# EAGLE board main (EAGLE 9.6.1)
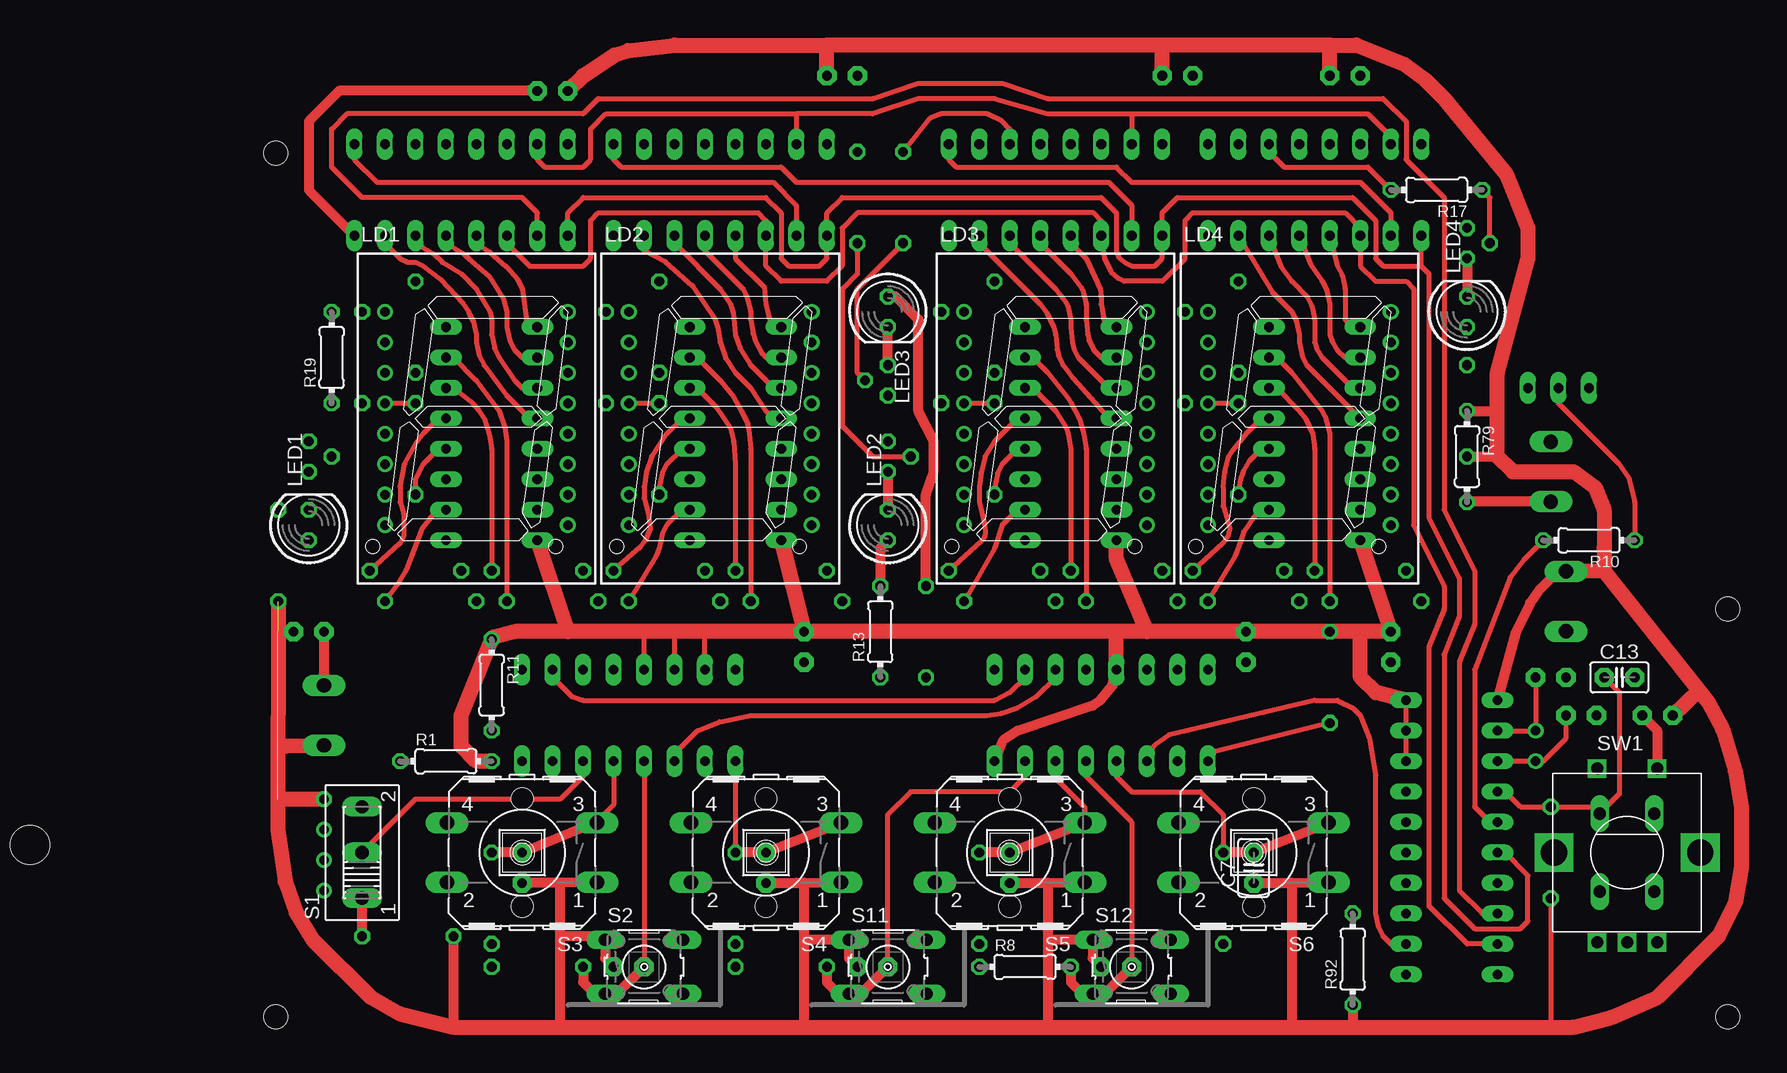
[diagram p0: board, top side]
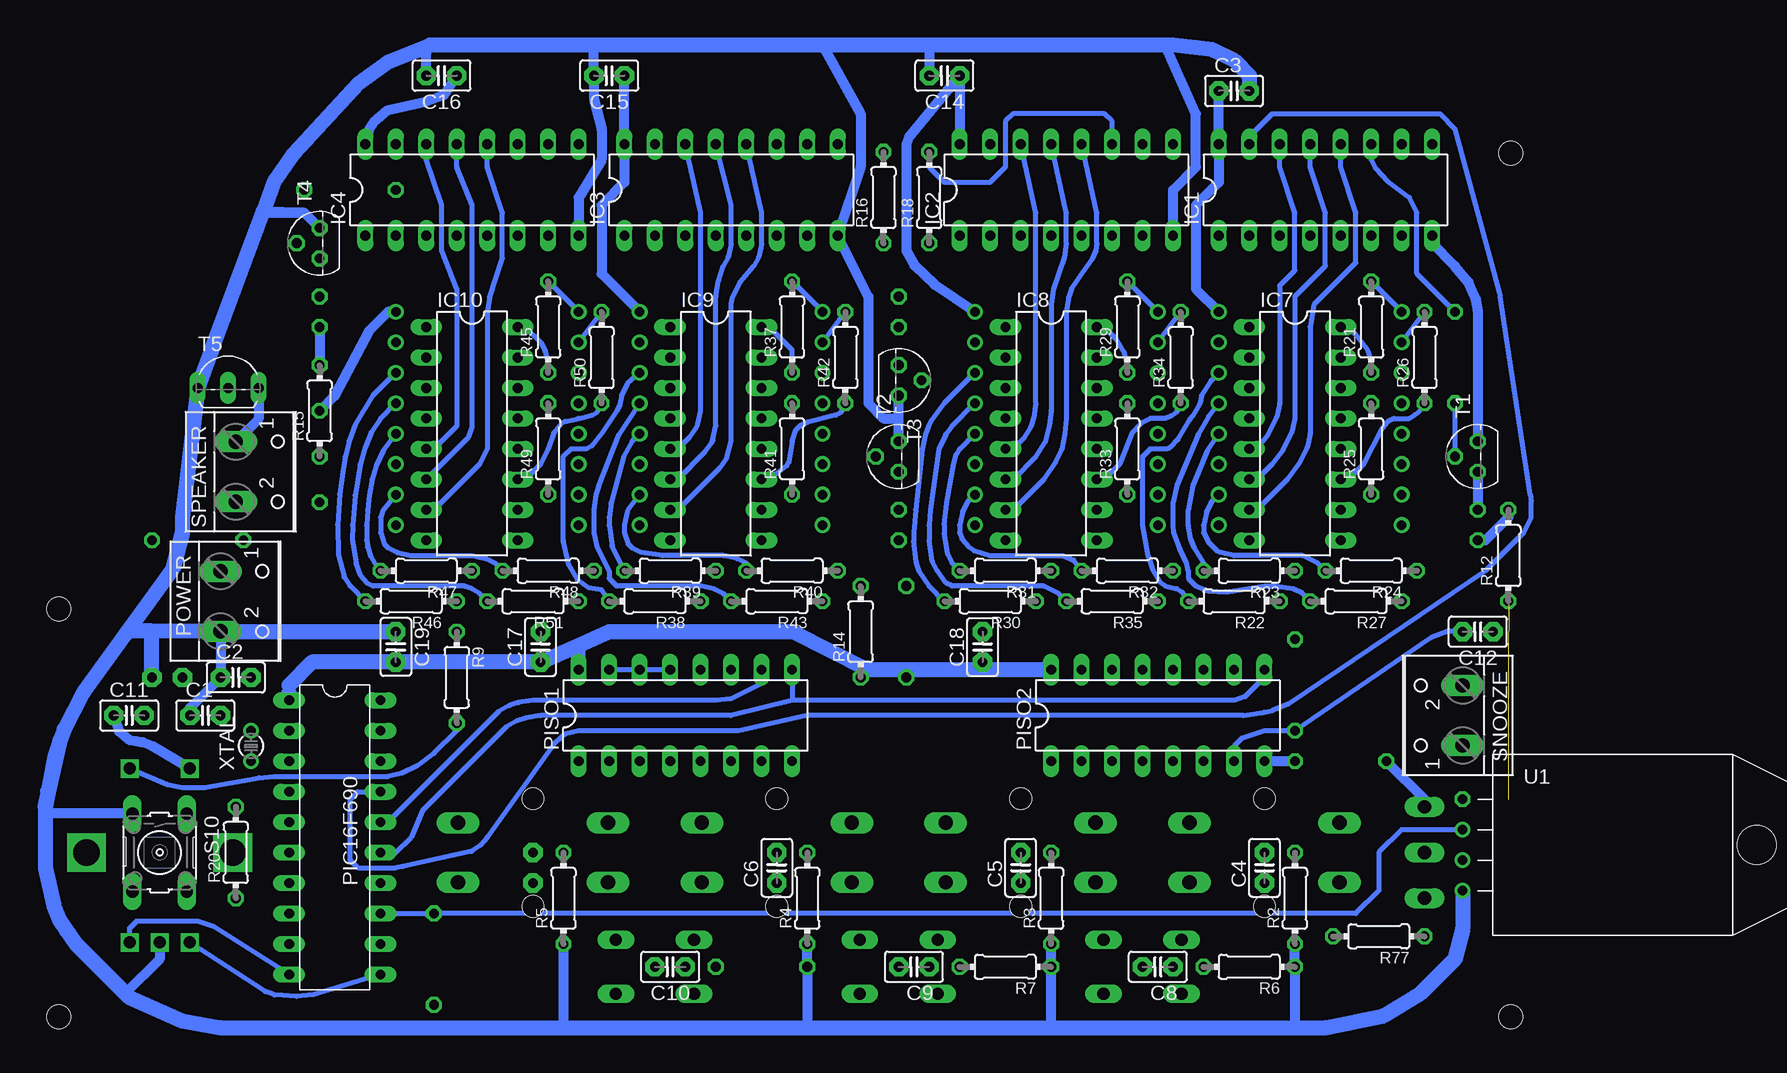
[diagram p1: board, bottom side, seen from below]

No outline drawn. Coordinates in mm, seen from the top.
Copper layers (1*16): Top 0.035mm / dielectric 0.15mm / Bottom 0.035mm
Design rules "default": minimum track width 6mil, minimum drill 0.35mm, track to track 6mil, track to pad 6mil, pad to pad 6mil, via to via 6mil, smd to smd 6mil, copper to edge 40mil, drill to drill 6mil, minimum pad ring 10mil, minimum via ring 8mil, stop-mask expansion 4mil, vias tented up to drill 0mil, thermal gap 10mil
Holes 2 mm at 29,6 29,78 150,40 150,6

## Footprints (pad centres in the part's own frame; a part is rotated, then mirrored left to right if it is on the bottom)
C2.5-2 = drill 0.813 pad 1.6 octagon: 1 -1.27,0; 2 1.27,0
DIL16 = drill 0.813 long: 1 -8.89,-3.81; 2 -6.35,-3.81; 3 -3.81,-3.81; 4 -1.27,-3.81; 5 1.27,-3.81; 6 3.81,-3.81; 7 6.35,-3.81; 8 8.89,-3.81; 9 8.89,3.81; 10 6.35,3.81; 11 3.81,3.81; 12 1.27,3.81; 13 -1.27,3.81; 14 -3.81,3.81; 15 -6.35,3.81; 16 -8.89,3.81
SA08 = drill 0.8 pad 1.27: 1 -7.62,8.89; 2 -7.62,6.35; 3 -7.62,3.81; 4 -7.62,1.27; 5 -7.62,-1.27; 6 -7.62,-3.81; 7 -7.62,-6.35; 8 -7.62,-8.89; 9 7.62,-8.89; 10 7.62,-6.35; 11 7.62,-3.81; 12 7.62,-1.27; 13 7.62,1.27; 14 7.62,3.81; 15 7.62,6.35; 16 7.62,8.89
LED5MM = drill 0.813 octagon: A -1.27,0; K 1.27,0
DIL20 = drill 0.813 long: 1 -11.43,-3.81; 2 -8.89,-3.81; 3 -6.35,-3.81; 4 -3.81,-3.81; 5 -1.27,-3.81; 6 1.27,-3.81; 7 3.81,-3.81; 8 6.35,-3.81; 9 8.89,-3.81; 10 11.43,-3.81; 11 11.43,3.81; 12 8.89,3.81; 13 6.35,3.81; 14 3.81,3.81; 15 1.27,3.81; 16 -1.27,3.81; 17 -3.81,3.81; 18 -6.35,3.81; 19 -8.89,3.81; 20 -11.43,3.81
W237-102 = drill 1.194 long: 1 -2.5,-1.27; 2 2.5,-1.27
0204/7 = drill 0.813 octagon: 1 -3.81,0; 2 3.81,0
255SB = drill 1.118 long: 1 -3.81,0; 2 0,0; 3 3.81,0
B3F-10XX = drill 1.016 long: 1 -3.251,2.261; 2 3.251,2.261; 3 -3.251,-2.261; 4 3.251,-2.261
B3F-40XX = drill 1.194 long: 1 -6.248,2.489; 2 6.248,2.489; 3 -6.248,-2.489; 4 6.248,-2.489 | hole 1.803: 0,-4.496; 0,4.496
ALPS_EC12E_SW = drill 1 square: A -2.5,-7.5; B 2.5,-7.5; C 0,-7.5; D -2.5,7; E 2.5,7 | drill 2.2 square: GND1 -6.1,0; GND2 6.1,0
TO92 = drill 0.813 octagon: 1 1.27,0; 2 0,1.905; 3 -1.27,0
TO92-EBC = drill 0.813 long: B 0,-1.27; C 2.54,-1.27; E -2.54,-1.27
RHT03_DHT-22/RA = drill 0.8: DATA -1.27,0; GND 3.81,0; NULL 1.27,0 | drill 0.8 octagon: VDD -3.81,0 | hole 3.25: 0,24.5
TC26V = drill 0.813: 1 -1.27,0; 2 1.27,0

## Placement (x,y rotation side)
C1  10pF  [C2.5-2]  137.79,31.11 0 bottom
C2  10pF  [C2.5-2]  135.25,34.29 0 bottom
C3  100nF  [C2.5-2]  52.07,83.19 0 bottom
C4  68nF  [C2.5-2]  49.53,18.41 90 bottom
C5  68nF  [C2.5-2]  69.85,18.41 90 bottom
C6  68nF  [C2.5-2]  90.17,18.41 90 bottom
C7  68nF  [C2.5-2]  110.49,18.41 90 top
C8  68nF  [C2.5-2]  58.42,10.16 180 bottom
C9  68nF  [C2.5-2]  78.74,10.16 180 bottom
C10  68nF  [C2.5-2]  99.06,10.16 180 bottom
C11  68nF  [C2.5-2]  144.15,31.11 0 bottom
C12  68nF  [C2.5-2]  31.75,38.1 180 bottom
C13  68nF  [C2.5-2]  140.97,34.29 0 top
C14  100nF  [C2.5-2]  76.2,84.45 180 bottom
C15  100nF  [C2.5-2]  104.14,84.45 180 bottom
C16  100nF  [C2.5-2]  118.11,84.45 180 bottom
C17  100nF  [C2.5-2]  109.86,36.83 90 bottom
C18  100nF  [C2.5-2]  73.03,36.83 90 bottom
C19  100nF  [C2.5-2]  121.92,36.83 270 bottom
IC1  4094N  [DIL16]  44.45,74.93 0 bottom
IC2  4094N  [DIL16]  66.04,74.93 0 bottom
IC3  4094N  [DIL16]  93.98,74.93 0 bottom
IC4  4094N  [DIL16]  115.57,74.93 0 bottom
IC7  ULN2003AN  [DIL16]  46.99,54.61 270 bottom
IC8  ULN2003AN  [DIL16]  67.31,54.61 270 bottom
IC9  ULN2003AN  [DIL16]  95.25,54.61 270 bottom
IC10  ULN2003AN  [DIL16]  115.57,54.61 270 bottom
LD1  SA08-11  [SA08]  45.72,55.88 0 top
LD2  SA08-11  [SA08]  66.04,55.88 0 top
LD3  SA08-11  [SA08]  93.98,55.88 0 top
LD4  SA08-11  [SA08]  114.3,55.88 0 top
LED1  [LED5MM]  31.75,46.99 90 top
LED2  [LED5MM]  80.01,46.99 90 top
LED3  [LED5MM]  80.01,64.77 270 top
LED4  [LED5MM]  128.27,64.77 90 top
PIC16F690  [DIL20]  127,20.95 270 bottom
PISO1  4021N  [DIL16]  97.79,31.11 0 bottom
PISO2  4021N  [DIL16]  58.42,31.11 0 bottom
POWER  [W237-102]  135.25,40.64 270 bottom
R1  560  [0204/7]  43.18,27.3 0 top
R2  560  [0204/7]  46.99,15.88 90 bottom
R3  560  [0204/7]  67.31,15.88 90 bottom
R4  560  [0204/7]  87.63,15.88 90 bottom
R5  560  [0204/7]  107.95,15.88 90 bottom
R6  560  [0204/7]  50.8,10.16 180 bottom
R7  560  [0204/7]  71.12,10.16 180 bottom
R8  560  [0204/7]  91.44,10.16 0 top
R9  560  [0204/7]  116.84,34.29 270 bottom
R10  1K  [0204/7]  138.43,45.72 180 top
R11  560  [0204/7]  46.99,33.66 270 top
R12  200  [0204/7]  29.21,44.45 90 bottom
R13  200  [0204/7]  79.38,38.1 90 top
R14  200  [0204/7]  83.19,38.1 90 bottom
R15  200  [0204/7]  128.27,56.52 90 bottom
R16  1K  [0204/7]  81.28,74.3 90 bottom
R17  1K  [0204/7]  125.73,74.93 180 top
R18  1K  [0204/7]  77.47,74.3 90 bottom
R19  1K  [0204/7]  33.66,60.96 90 top
R20  560  [0204/7]  135.25,19.68 90 bottom
R21  200  [0204/7]  40.64,63.5 90 bottom
R22  200  [0204/7]  52.07,40.64 180 bottom
R23  200  [0204/7]  50.8,43.18 180 bottom
R24  200  [0204/7]  40.64,43.18 180 bottom
R25  200  [0204/7]  40.64,53.34 90 bottom
R26  200  [0204/7]  36.2,60.96 90 bottom
R27  200  [0204/7]  41.91,40.64 180 bottom
R29  200  [0204/7]  60.96,63.5 90 bottom
R30  200  [0204/7]  72.39,40.64 180 bottom
R31  200  [0204/7]  71.12,43.18 180 bottom
R32  200  [0204/7]  60.96,43.18 180 bottom
R33  200  [0204/7]  60.96,53.34 90 bottom
R34  200  [0204/7]  56.52,60.96 90 bottom
R35  200  [0204/7]  62.23,40.64 180 bottom
R37  200  [0204/7]  88.9,63.5 90 bottom
R38  200  [0204/7]  100.33,40.64 180 bottom
R39  200  [0204/7]  99.06,43.18 180 bottom
R40  200  [0204/7]  88.9,43.18 180 bottom
R41  200  [0204/7]  88.9,53.34 90 bottom
R42  200  [0204/7]  84.45,60.96 90 bottom
R43  200  [0204/7]  90.17,40.64 180 bottom
R45  200  [0204/7]  109.22,63.5 90 bottom
R46  200  [0204/7]  120.65,40.64 180 bottom
R47  200  [0204/7]  119.38,43.18 180 bottom
R48  200  [0204/7]  109.22,43.18 180 bottom
R49  200  [0204/7]  109.22,53.34 90 bottom
R50  200  [0204/7]  104.78,60.96 90 bottom
R51  200  [0204/7]  110.49,40.64 180 bottom
R77  560  [0204/7]  40.01,12.7 180 bottom
R79  100  [0204/7]  128.27,52.7 270 top
R92  5K  [0204/7]  118.75,10.79 90 top
S1  [255SB]  36.2,19.68 90 top
S2  [B3F-10XX]  59.69,10.16 0 top
S3  [B3F-40XX]  49.53,19.68 180 top
S4  [B3F-40XX]  69.85,19.68 180 top
S5  [B3F-40XX]  90.17,19.68 180 top
S6  [B3F-40XX]  110.49,19.68 180 top
S10  [B3F-10XX]  141.6,19.68 270 bottom
S11  [B3F-10XX]  80.01,10.16 0 top
S12  [B3F-10XX]  100.33,10.16 0 top
SNOOZE  [W237-102]  34.29,31.11 90 bottom
SPEAKER  [W237-102]  133.99,51.44 270 bottom
SW1  EC12E_SW  [ALPS_EC12E_SW]  141.6,19.68 0 top
T1  BC547  [TO92]  31.75,52.7 90 bottom
T2  BC547  [TO92]  80.01,52.7 90 bottom
T3  BC547  [TO92]  80.01,59.05 270 bottom
T4  BC547  [TO92]  128.27,70.48 90 bottom
T5  [TO92-EBC]  135.89,59.69 0 bottom
U1  [RHT03_DHT-22/RA]  33.02,20.32 270 bottom
XTAL  [TC26V]  133.99,28.57 90 bottom

## Library data of the parts
C1-C19 = capacitor-wima
IC1-IC4 PISO1 PISO2 = 40xx
IC7-IC10 = uln-udn
LD1-LD4 LED1-LED4 = led
PIC16F690 = pic16f690
POWER SNOOZE SPEAKER = con-wago-500; MPN: 237-102; OC_FARNELL: unknown; OC_NEWARK: 70K9898
R1-R27 R29-R35 R37-R43 R45-R51 R77 R79 R92 = rcl; SPICEPREFIX: R
S1 = switch
S2 S10-S12 = switch-omron; MPN: B3F-1000; OC_FARNELL: 176432; OC_NEWARK: 36M3542
S3-S6 = switch-omron; MF: OMRON COMPONENTS USA; MPN: B3F-4000; OC_FARNELL: 176434; OC_NEWARK: 36K3105
SW1 = switch-alps; MPN: EC12E2424407; OC_FARNELL: 1520813; OC_NEWARK: 74M1068
T1-T4 = transistor
T5 = transistor-neu-to92
U1 = RHT03_DHT-22_AM2302; PROD_ID: SEN-10167
XTAL = crystal; OC_FARNELL: unknown; OC_NEWARK: unknown

## Nets
BTN_ALARM_SET: C4.2 PISO2.5 R2.2 S3.3
BTN_ALARM_TIMER_ON: PISO2.6 S1.2
BTN_BRIGHT_SET: C10.2 PISO1.5 R8.2 S12.3
BTN_ENCODER: C11.2 PISO1.1 R9.2 SW1.E
BTN_RESET: C13.1 PIC16F690.4 R20.2 S10.1
BTN_SEC_SET: C6.2 PISO1.6 R4.2 S5.3
BTN_SENSOR: C7.2 PISO1.4 R5.2 S6.3
BTN_SNOOZE: C12.2 PISO2.7 R11.2 SNOOZE.2
BTN_TIME_SET: C5.2 PISO2.1 R3.2 S4.3
BTN_TUNE_SET: C9.2 PISO1.7 R7.2 S11.3
BTN_VOLUME_SET: C8.2 PISO2.4 R6.2 S2.3
DHT11: PIC16F690.13 R92.2 U1.DATA
ENC_A: PIC16F690.11 SW1.A
ENC_B: PIC16F690.10 SW1.B
N$1: C1.2 PIC16F690.3 XTAL.1
N$2: C2.2 PIC16F690.2 XTAL.2
N$3: IC7.16 R21.1
N$5: IC7.15 R22.1
N$6: IC7.14 R23.1
N$7: R10.1 T5.B
N$8: R18.1 T2.2
N$9: IC3.4 IC9.1
N$13: IC3.5 IC9.2
N$14: IC3.6 IC9.3
N$15: IC3.7 IC9.4
N$16: IC3.14 IC9.5
N$17: IC3.13 IC9.6
N$18: IC3.12 IC9.7
N$19: IC1.11 R19.2
N$21: IC2.4 IC8.1
N$22: IC2.5 IC8.2
N$23: IC7.13 R24.1
N$24: IC7.12 R25.1
N$25: IC7.11 R26.1
N$26: IC2.6 IC8.3
N$27: IC2.7 IC8.4
N$28: IC2.14 IC8.5
N$29: IC2.13 IC8.6
N$30: IC2.12 IC8.7
N$31: IC2.11 R18.2
N$32: IC1.4 IC7.1
N$33: IC1.5 IC7.2
N$34: IC1.6 IC7.3
N$35: IC1.7 IC7.4
N$36: IC1.14 IC7.5
N$37: IC1.13 IC7.6
N$38: IC1.12 IC7.7
N$39: IC3.11 R16.2
N$40: IC4.4 IC10.1
N$41: IC4.5 IC10.2
N$42: IC4.6 IC10.3
N$43: IC4.7 IC10.4
N$44: IC4.14 IC10.5
N$45: IC4.13 IC10.6
N$46: IC4.12 IC10.7
N$47: IC4.11 R17.2
N$48: LD1.1 R21.2
N$49: LD1.14 R22.2
N$50: LD1.12 R23.2
N$51: LD1.10 R24.2
N$52: LD1.4 R25.2
N$53: LD1.2 R26.2
N$54: LD1.13 R27.2
N$56: LD2.1 R29.2
N$57: LD2.14 R30.2
N$58: LD2.12 R31.2
N$59: LD2.10 R32.2
N$60: LD2.4 R33.2
N$61: LD2.2 R34.2
N$62: LD2.13 R35.2
N$64: LD3.1 R37.2
N$65: LD3.14 R38.2
N$66: LD3.12 R39.2
N$67: LD3.10 R40.2
N$68: LD3.4 R41.2
N$69: LD3.2 R42.2
N$70: LD3.13 R43.2
N$72: LD4.1 R45.2
N$73: LD4.14 R46.2
N$74: LD4.12 R47.2
N$75: LD4.10 R48.2
N$76: LD4.4 R49.2
N$77: LD4.2 R50.2
N$78: LD4.13 R51.2
N$80: LED1.K T1.3
N$81: LED2.K T2.3
N$82: LED3.K T3.3
N$83: LED4.K T4.3
N$84: R19.1 T1.2
N$86: R16.1 T3.2
N$87: R17.1 T4.2
N$88: LED4.A R15.2
N$89: LED3.A R14.2
N$90: LED2.A R13.2
N$91: LED1.A R12.2
N$92: IC7.10 R27.1
N$93: IC1.9 IC2.2
N$94: IC2.9 IC3.2
N$95: IC3.9 IC4.2
N$97: IC8.16 R29.1
N$98: IC8.15 R30.1
N$99: IC8.14 R31.1
N$100: IC8.13 R32.1
N$101: IC8.12 R33.1
N$102: IC8.11 R34.1
N$103: IC8.10 R35.1
N$105: IC9.16 R37.1
N$106: IC9.15 R38.1
N$107: IC9.14 R39.1
N$108: IC9.13 R40.1
N$109: IC9.12 R41.1
N$110: IC9.11 R42.1
N$111: IC9.10 R43.1
N$113: IC10.16 R45.1
N$114: IC10.15 R46.1
N$115: IC10.14 R47.1
N$116: IC10.13 R48.1
N$117: IC10.12 R49.1
N$118: IC10.11 R50.1
N$119: IC10.10 R51.1
N$143: R77.1 S1.1
N$145: R1.1 S1.3
N$146: R79.2 SPEAKER.2
N$147: SPEAKER.1 T5.C
PISO-CONNECT: PISO1.11 PISO2.3
PISO_CLK: PIC16F690.16 PISO1.10 PISO2.10
PISO_DAT: PIC16F690.12 PISO1.3
PISO_LAT: PIC16F690.15 PISO1.9 PISO2.9
PWM: PIC16F690.5 R10.2
SIPO_CLK: IC1.3 IC2.3 IC3.3 IC4.3 PIC16F690.9
SIPO_DAT: IC1.2 PIC16F690.8
SIPO_LAT: IC1.1 IC2.1 IC3.1 IC4.1 PIC16F690.6
SIPO_OE: IC1.15 IC2.15 IC3.15 IC4.15 PIC16F690.17
VDD: C3.1 C4.1 C5.1 C6.1 C7.1 C8.1 C9.1 C10.1 C11.1 C12.1 C14.1 C15.1 C16.1 C17.1 C18.1 C19.2 IC1.16 IC2.16 IC3.16 IC4.16 LD1.16 LD2.16 LD3.16 LD4.16 PIC16F690.1 PISO1.16 PISO2.16 POWER.1 R12.1 R13.1 R14.1 R15.1 R20.1 R77.2 R79.1 R92.1 S2.1 S3.1 S4.1 S5.1 S6.1 S11.1 S12.1 SNOOZE.1 SW1.D U1.VDD
VSS: C1.1 C2.1 C3.2 C13.2 C14.2 C15.2 C16.2 C17.2 C18.2 C19.1 IC1.8 IC2.8 IC3.8 IC4.8 IC7.8 IC8.8 IC9.8 IC10.8 PIC16F690.18 PIC16F690.19 PIC16F690.20 PISO1.8 PISO1.13 PISO1.14 PISO1.15 PISO2.8 PISO2.13 PISO2.14 PISO2.15 POWER.2 R1.2 R2.1 R3.1 R4.1 R5.1 R6.1 R7.1 R8.1 R9.1 R11.1 S10.3 SW1.C T1.1 T2.1 T3.1 T4.1 T5.E U1.GND

## Tracks (layer width: path | path; a pad name or v marks a point on that pad's centre or on a via)
BTN_ALARM_SET
  Top 0.406: PISO2.5 57.15,23.65 55.73,22.23
  Top 0.813: S3.3 55.73,22.23 C4.2 R2.2
BTN_ALARM_TIMER_ON
  Top 0.406: PISO2.6 54.61,26.04 52.7,24.13 40.64,24.13 S1.2
BTN_BRIGHT_SET
  Top 0.406: C10.2 100.33,22.23 96.52,26.04 PISO1.5
  Top 0.813: C10.2 98.07,7.9 S12.3 96.24,7.9 95.25,8.89 R8.2
BTN_ENCODER
  Top 0.406: PISO1.1 106.68,27.94 R9.2
  Top 0.813: C11.2 144.1,29.89 SW1.E
  Bottom 0.406: R9.2 116.84,29.84 118.75,27.94 120.14,26.92 121.41,26.29 122.56,26.04 132.08,26.04 133.33,25.93 137.84,25.11 139.7,25.11 140.98,25.38 SW1.E
BTN_RESET
  Top 0.406: PIC16F690.4 131.44,24.77 132.72,23.5 R20.2 138.79,23.5 S10.1 140.97,24.56 140.97,33.02 C13.1
BTN_SEC_SET
  Top 0.406: PISO1.6 93.98,25.88 96.42,23.44 S5.3
  Top 0.813: R4.2 C6.2 S5.3
BTN_SENSOR
  Top 0.406: PISO1.4 99.06,26.04 100.33,24.77 106.05,24.77 107.95,22.86 R5.2
  Top 0.813: R5.2 C7.2 S6.3
BTN_SNOOZE
  Top 0.813: SNOOZE.2 C12.2
  Bottom 0.406: PISO2.7 52.07,28.57 51.44,29.21 49.53,29.84 R11.2 35.65,37.6 34.29,38.1 C12.2
BTN_TIME_SET
  Top 0.406: PISO2.1 R3.2
  Top 0.813: R3.2 C5.2 S4.3
BTN_TUNE_SET
  Top 0.406: C9.2 80.01,22.86 81.92,24.77 90.17,24.77 91.44,26.04 PISO1.7
  Top 0.813: C9.2 77.75,7.9 S11.3 76.48,7.62 76.2,7.62 74.93,8.89 R7.2
BTN_VOLUME_SET
  Top 0.406: PISO2.4 C8.2
  Top 0.813: C8.2 57.43,7.9 S2.3 56.16,7.62 55.88,7.62 54.61,8.89 R6.2
DHT11
  Bottom 0.406: 123.83,14.61 PIC16F690.13 R92.2 41.91,14.61 40.01,16.51 40.01,19.68 38.1,21.59 U1.DATA
ENC_A
  Bottom 0.406: PIC16F690.11 128.78,7.85 130.18,7.69 132.01,7.82 132.82,8.1 SW1.A
ENC_B
  Bottom 0.406: SW1.B 144.1,13.38 143.51,13.97 138.43,13.97 137.06,13.5 PIC16F690.10
N$1
  Top 0.406: PIC16F690.3 XTAL.1 134.62,27.3 136.53,29.21 C1.2
N$2
  Top 0.406: PIC16F690.2 XTAL.2 C2.2
N$3
  Bottom 0.406: R21.1 40.64,60.33 40.89,61.47 41.02,61.72 41.91,62.87 42.55,63.5 IC7.16
N$5
  Top 0.406: R22.1 48.26,53.98 48.07,55.18 47.62,56.52 45.72,59.05 43.81,60.96 | IC7.15 43.81,60.96 | 43.81,60.96 43.59,60.66
N$6
  Top 0.406: R23.1 46.99,53.34 46.8,54.55 46.35,55.88 45.87,56.61 45.22,57.33 43.81,58.42 IC7.14
N$7
  Top 0.406: R10.1 142.24,48.9 141.75,50.9 140.97,52.07 135.89,57.15 T5.B
N$8
  Top 0.406: R18.1 77.47,67.94 76.2,66.67 76.2,55.24 78.74,52.7 T2.2
N$9
  Top 0.406: IC3.4 95.25,70.48 96.52,69.22 97.72,66.67 97.79,66.04 97.79,65.41 97.98,64.2 98.11,63.82 98.42,63.5 IC9.1
N$13
  Top 0.406: IC3.5 92.71,70.48 95.25,67.94 96.14,66.8 96.27,66.55 96.52,65.41 96.52,64.14 96.65,62.9 96.77,62.36 97.16,61.59 97.79,60.96 IC9.2
N$14
  Top 0.406: IC3.6 90.17,70.48 93.98,66.67 94.87,65.53 95,65.28 95.25,64.14 95.25,63.5 95.38,62.26 95.5,61.72 95.89,60.96 98.42,58.42 IC9.3
N$15
  Top 0.406: IC3.7 87.63,70.48 92.71,65.41 93.26,64.7 93.85,63.47 93.98,62.87 94.11,61.62 94.23,61.09 94.61,60.33 95.45,59.21 97.23,57.22 98.42,55.88 IC9.4
N$16
  Bottom 0.406: IC9.5 98.42,53.34 97.47,54.29 96.9,55.12 96.77,55.37 96.52,56.52 96.52,73.03 IC3.14
N$17
  Bottom 0.406: IC9.6 98.42,50.8 96.2,53.02 95.63,53.85 95.5,54.1 95.25,55.24 95.25,66.04 95.06,67.25 94.61,68.58 94.23,69.34 93.98,70.48 93.98,73.66 IC3.13
N$18
  Bottom 0.406: IC9.7 98.42,48.26 94.93,51.75 94.36,52.58 93.98,53.98 93.98,65.41 93.86,66.02 93.22,67.25 92.08,68.58 91.69,69.34 91.44,70.48 91.44,73.03 IC3.12
N$19
  Bottom 0.406: IC1.11 40.64,77.47 40.26,76.71 39.29,75.67 37.47,74.3 36.83,73.03 36.83,67.94 R19.2
N$21
  Top 0.406: IC2.4 67.31,69.22 69.69,66.83 69.85,65.41 70.1,64.26 70.48,63.5 IC8.1
N$22
  Top 0.406: IC8.2 69.85,60.96 69.53,61.28 68.96,62.36 68.77,62.93 68.58,64.14 68.58,64.77 68.2,66.17 67.94,66.67 64.77,69.85 IC2.5
N$23
  Top 0.406: IC7.13 42.55,55.88 41.27,54.61 40.75,53.91 39.76,52.12 39.37,50.16 39.37,48.9 39.65,47.93 39.65,46.04 39.33,45.44 R24.1
N$24
  Top 0.406: IC7.12 42.55,53.34 41.27,52.07 40.64,50.8 R25.1
N$25
  Bottom 0.406: IC7.11 42.55,50.8 41.27,52.07 39.71,55.09 39.24,55.63 38.73,55.88 37.47,55.88 37.03,56.17 36.67,56.41 R26.1
N$26
  Top 0.406: IC8.3 70.48,58.42 68.58,60.33 67.69,61.72 67.31,62.87 67.12,64.71 66.86,65.47 66.04,66.67 62.23,70.48 IC2.6
N$27
  Top 0.406: IC2.7 59.69,69.85 61.47,68.96 63.76,66.92 65.6,64.2 65.85,63.44 66.04,62.23 66.48,60.9 67.31,59.69 68.58,58.42 69.85,56.52 70.48,55.88 IC8.4
N$28
  Bottom 0.406: IC8.5 70.48,53.34 69.53,54.29 69.03,55.18 68.77,55.94 68.58,57.15 68.58,73.03 IC2.14
N$29
  Bottom 0.406: IC8.6 70.48,50.8 68.58,52.7 67.8,53.94 67.46,55.28 67.31,56.52 67.31,65.41 67.12,66.61 66.23,69.28 66.04,70.48 66.04,73.03 IC2.13
N$30
  Bottom 0.406: IC8.7 70.48,48.26 67.94,50.8 66.95,52.2 66.43,53.29 66.16,54.63 66.04,55.88 66.04,64.77 65.85,65.98 65.6,66.74 64.77,67.94 63.91,69.12 63.6,69.86 63.5,70.48 63.5,73.03 IC2.12
N$31
  Bottom 0.406: IC2.11 62.23,80.64 62.87,81.28 70.48,81.28 71.12,80.64 71.12,76.83 72.39,75.56 76.2,75.56 77.47,76.83 R18.2
N$32
  Top 0.406: IC7.1 50.16,63.5 49.91,64.01 49.53,66.67 49.15,67.44 48.23,68.55 46.89,69.7 45.72,70.48 IC1.4
N$33
  Top 0.406: IC7.2 49.53,60.96 48.9,61.59 48.51,62.36 48.26,63.5 48.26,64.77 47.97,65.86 46.8,67.73 45.09,69.22 44.77,69.53 43.18,70.48 IC1.5
N$34
  Top 0.406: IC7.3 49.53,58.42 48.9,59.05 47.62,60.96 47.24,61.72 46.99,62.87 46.99,64.14 46.86,64.74 45.72,66.67 44.45,67.94 42.86,68.9 42.23,69.53 40.64,70.48 IC1.6
N$35
  Top 0.406: IC7.4 50.16,55.88 48.26,57.78 46.35,60.33 45.97,61.09 45.72,62.23 45.72,62.87 45.47,64.01 45.09,64.77 44.6,65.5 42.7,67.51 41.27,68.58 40.64,68.9 40.01,68.9 39.37,69.22 38.1,70.48 IC1.7
N$36
  Bottom 0.406: IC7.5 50.16,53.34 49.28,54.48 48.51,56.01 48.26,57.15 48.26,66.94 46.99,68.21 46.99,73.03 48.26,76.83 IC1.14
N$37
  Bottom 0.406: IC7.6 50.16,50.8 48.9,52.07 48.01,53.21 47.24,54.74 46.99,55.88 46.99,66.04 44.45,68.58 44.45,73.03 45.72,76.83 IC1.13
N$38
  Bottom 0.406: IC7.7 50.16,48.26 47.62,50.8 46.61,52.2 45.97,53.47 45.72,54.61 45.72,63.5 45.41,65.35 41.91,68.86 41.91,73.03 43.18,76.83 IC1.12
N$39
  Top 0.406: IC3.11 90.17,80.01 89.53,80.64 88.27,81.28 84.45,81.28 83.51,80.89 R16.2
N$40
  Top 0.406: IC10.1 118.75,63.5 118.11,64.14 118.11,66.67 117.86,67.82 117.47,68.58 IC4.4
N$41
  Top 0.406: IC10.2 118.11,60.96 117.47,61.59 117.03,62.29 116.84,62.87 116.84,65.41 116.59,66.55 116.2,67.31 115.26,68.71 IC4.5
N$42
  Top 0.406: IC10.3 118.75,58.42 116.2,60.96 115.76,61.66 115.57,62.23 115.57,64.14 115.32,65.28 114.94,66.04 113.67,67.31 112.81,68.49 IC4.6
N$43
  Top 0.406: IC10.4 114.94,60.33 114.55,61.09 114.3,62.23 114.3,62.87 114.05,64.01 113.67,64.77 112.08,66.36 IC4.7
N$44
  Bottom 0.406: IC10.5 118.75,53.34 116.84,55.24 116.84,66.67 118.11,69.85 118.11,73.66 119.38,77.47 IC4.14
N$45
  Bottom 0.406: 118.75,50.8 IC10.6 115.89,54.29 115.57,55.24 115.57,73.66 116.84,76.83 IC4.13
N$46
  Bottom 0.406: IC10.7 118.75,48.26 114.94,52.07 114.3,53.34 114.3,64.77 114.11,65.98 113.03,69.22 113.03,73.03 114.3,76.83 IC4.12
N$47
  Top 0.406: IC4.11 111.76,78.11 113.03,76.83 120.02,76.83 R17.2
N$48
  Bottom 0.406: R21.2 LD1.1
N$49
  Bottom 0.406: LD1.14 53.98,59.05 54.76,57.82 54.95,57.08 55.52,56.09 55.76,55.79 56.75,54.11 57.3,53.55 57.48,53.42 57.78,53.34 59.05,53.34 59.69,52.7 59.69,46.99 59.22,44.39 58.82,43.26 58.23,42.2 57.78,41.91 56.81,41.67 56.37,41.37 R22.2
N$50
  Bottom 0.406: LD1.12 54.29,53.21 55.06,51.36 55.5,50.29 55.88,48.26 55.88,46.99 55.66,45.81 55.35,45.04 54.61,43.81 R23.2
N$51
  Bottom 0.406: R24.2 45.09,43.81 46.35,44.45 52.07,44.45 53.21,44.7 53.47,44.83 54.23,45.59 54.61,46.35 54.61,46.99 54.36,48.13 53.98,48.9 LD1.10
N$52
  Top 0.406: LD1.4 R25.2
N$53
  Bottom 0.406: R26.2 LD1.2
N$54
  Bottom 0.406: R27.2 46.35,41.27 47.12,41.66 48.9,41.91 49.53,41.91 52.73,41.42 54.2,41.49 55.24,41.91 55.88,42.55 55.88,43.18 56.03,43.78 56.59,45.04 57.08,46.36 57.15,46.99 57.15,48.9 56.83,50.3 55.07,54.54 54.18,56.04 LD1.13
N$56
  Bottom 0.406: LD2.1 R29.2
N$57
  Bottom 0.406: LD2.14 76.2,57.15 77.25,55.76 77.52,55.27 77.8,54.5 78.06,53.34 78.61,48.24 78.74,46.35 78.74,45.72 78.55,43.88 78.3,43.12 77.47,41.91 R30.2
N$58
  Bottom 0.406: R31.2 75.56,43.81 75.95,44.58 76.2,46.35 76.2,46.99 76.01,48.83 75.44,52.06 75.22,52.89 74.93,53.34 LD2.12
N$59
  Bottom 0.406: LD2.10 74.3,48.9 74.68,48.13 74.93,46.99 74.93,46.35 74.73,45.79 74.21,45.2 73.73,44.85 72.39,44.45 66.36,44.45 65.46,44.09 R32.2
N$60
  Top 0.406: LD2.4 R33.2
N$61
  Bottom 0.406: R34.2 LD2.2
N$62
  Bottom 0.406: R35.2 66.67,41.27 67.94,41.91 75.56,41.91 76.07,42.16 76.81,43.2 77.21,43.95 77.47,45.72 77.47,46.99 77.38,48.25 76.66,53.31 76.11,54.54 75.56,55.24 LD2.13
N$64
  Bottom 0.406: LD3.1 R37.2
N$65
  Bottom 0.406: LD3.14 102.62,58.77 103.1,57.83 103.25,57.02 103.5,56.52 104.78,54.61 105.57,53.61 106.05,53.34 107.31,53.34 107.95,52.7 107.95,45.72 107.52,43.7 106.78,42.4 105.83,41.76 104.78,41.59 R38.2
N$66
  Bottom 0.406: R39.2 103.89,45.21 104.14,46.99 104.14,47.62 103.98,48.85 102.92,52.73 102.23,53.98 LD3.12
N$67
  Bottom 0.406: R40.2 92.71,43.81 93.47,44.2 94.61,44.45 99.69,44.45 101.47,44.7 102.23,45.09 102.55,45.4 102.87,46.35 102.87,46.99 102.62,48.13 102.49,48.39 LD3.10
N$68
  Top 0.406: LD3.4 R41.2
N$69
  Bottom 0.406: R42.2 LD3.2
N$70
  Bottom 0.406: R43.2 94.61,41.27 95.38,41.66 96.52,41.91 103.5,41.91 104.14,42.55 104.14,43.18 105.16,45.21 105.41,46.35 105.41,48.26 105.24,49.48 105.03,50.24 103.36,54.51 LD3.13
N$72
  Bottom 0.406: LD4.1 R45.2
N$73
  Bottom 0.406: LD4.14 123.83,57.78 125.28,55.36 125.8,54 126.13,52.67 126.32,51.43 126.61,49.57 126.77,47 126.7,44.53 126.22,42.64 125.73,41.91 R46.2
N$74
  Bottom 0.406: LD4.12 122.99,53.19 123.54,51.94 123.89,50.81 124.13,49.47 124.28,48.24 124.36,46.99 124.36,45.73 124.27,45.15 124.02,44.39 123.51,43.5 R47.2
N$75
  Bottom 0.406: R48.2 113.67,43.81 114.43,44.2 115.57,44.45 120.65,44.45 121.79,44.7 122.56,45.09 122.87,45.4 123.19,46.35 123.19,47.62 123,48.2 LD4.10
N$76
  Top 0.406: LD4.4 R49.2
N$77
  Bottom 0.406: R50.2 LD4.2
N$78
  Bottom 0.406: R51.2 114.94,41.27 115.63,41.72 116.2,41.91 123.83,41.91 124.33,42.16 124.83,42.77 125.24,43.8 125.53,45.75 125.53,46.99 125.32,49.46 124.89,52.04 124.51,53.36 123.97,54.71 123.19,55.88 LD4.13
N$80
  Bottom 0.813: T1.3 LED1.K
N$81
  Top 0.813: T2.3 LED2.K
N$82
  Top 0.813: T3.3 LED3.K
N$83
  Top 0.813: T4.3 LED4.K
N$84
  Bottom 0.406: R19.1 T1.2
N$86
  Top 0.406: T3.2 77.47,59.69 77.47,66.67 R16.1
N$87
  Top 0.406: T4.2 130.18,74.3 R17.1
N$88
  Bottom 0.813: LED4.A R15.2
N$89
  Top 0.813: LED3.A 80.64,66.04 82.55,64.14 82.55,56.52 83.82,53.98 83.82,51.44 83.19,49.53 R14.2
N$90
  Top 0.813: LED2.A 79.38,45.09 R13.2
N$91
  Bottom 0.813: R12.2 29.21,47.62 31.11,45.72 LED1.A
N$92
  Top 0.406: R27.1 39.17,42.06 39.86,43.26 41.21,46.72 41.91,47.62 42.23,47.94 IC7.10
N$93
  Top 0.406: 72.39,70.48 IC2.2 72.39,73.66 70.48,75.56 37.47,75.56 35.56,77.47 IC1.9
N$94
  Top 0.406: IC2.9 57.15,77.47 57.78,76.83 71.12,76.83 72.39,75.56 98.42,75.56 100.33,73.66 IC3.2
N$95
  Top 0.406: IC3.9 85.09,77.47 85.72,76.83 99.06,76.83 100.33,75.56 119.38,75.56 121.92,73.03 IC4.2
N$97
  Bottom 0.406: R29.1 60.96,60.33 61.24,61.43 61.91,62.55 62.87,63.5 IC8.16
N$98
  Top 0.406: IC8.15 64.14,60.96 66.04,59.05 67.16,57.66 67.85,56.46 68.32,55.41 68.47,54.6 68.58,53.34 R30.1
N$99
  Top 0.406: IC8.14 64.14,58.42 65.72,56.83 66.86,55.13 67.16,53.94 67.31,52.07 R31.1
N$100
  Top 0.406: IC8.13 62.87,55.88 61.59,54.61 60.33,52.7 59.88,51.37 59.69,50.16 59.69,49.21 60.05,47.95 60.21,46.72 59.78,45.69 59.35,45.11 57.3,43.34 R32.1
N$101
  Top 0.406: IC8.12 62.87,53.34 61.59,52.07 61.21,51.31 60.96,50.16 R33.1
N$102
  Bottom 0.406: IC8.11 62.87,50.8 61.59,52.07 60.54,54.7 59.82,55.5 59.05,55.88 57.78,55.88 57.3,56.08 56.9,56.39 R34.1
N$103
  Top 0.406: 58.52,40.64 R35.1 60.7,44.43 60.96,45.09 61.21,46.23 61.59,46.99 62.87,48.26 IC8.10
N$105
  Bottom 0.406: IC9.16 90.81,63.5 88.9,61.59 R37.1
N$106
  Top 0.406: IC9.15 92.08,60.96 93.34,59.69 95.02,57.6 95.29,57.18 95.94,55.9 96.34,54.56 96.52,53.34 R38.1
N$107
  Top 0.406: IC9.14 92.08,58.42 93.98,56.52 94.87,55.12 95.06,54.55 95.25,53.34 R39.1
N$108
  Top 0.406: IC9.13 90.81,55.88 88.9,53.98 88.12,52.74 87.78,51.4 87.63,50.16 87.63,48.9 88.07,47 88.14,46.38 88.07,46.01 87.78,45.61 R40.1
N$109
  Top 0.406: R41.1 88.9,50.16 89.15,51.31 89.53,52.07 90.81,53.34 IC9.12
N$110
  Bottom 0.406: R42.1 84.84,56.39 85.25,56.15 87.56,55.59 88.27,55.24 88.58,54.93 88.9,53.98 89.17,52.23 89.33,51.95 90.12,51.31 IC9.11
N$111
  Top 0.406: IC9.10 90.81,48.26 89.53,46.99 88.9,45.09 R43.1
N$113
  Bottom 0.406: R45.1 109.22,60.33 109.47,61.47 109.86,62.23 111.12,63.5 IC10.16
N$114
  Top 0.406: IC10.15 112.39,60.96 113.67,59.69 116.2,56.52 116.46,56.01 116.84,54.61 R46.1
N$115
  Top 0.406: IC10.14 112.39,58.42 114.3,56.52 114.85,55.81 115.44,54.58 115.57,53.34 R47.1
N$116
  Top 0.406: IC10.13 111.12,55.88 109.86,54.61 108.75,53.23 108.44,52.74 108.1,51.4 107.95,50.16 107.95,48.58 108.27,47.62 108.5,46.7 108.31,46.02 107.91,45.45 R48.1
N$117
  Top 0.406: IC10.12 111.12,53.34 110.17,52.39 109.66,51.51 109.4,50.77 R49.1
N$118
  Bottom 0.406: IC10.11 111.12,50.8 109.86,52.07 109.22,53.34 108.78,54.67 108.08,55.5 107.82,55.63 106.68,55.88 105.57,56.15 105.16,56.39 R50.1
N$119
  Top 0.406: IC10.10 111.12,48.26 110.49,47.62 109.67,46.42 109.41,45.66 108.95,44.42 R51.1
N$143
  Top 0.813: R77.1 S1.1
N$145
  Bottom 0.813: R1.1 36.2,24.13 S1.3
N$146
  Top 0.813: SPEAKER.2 128.31,48.94 R79.2
N$147
  Bottom 0.813: T5.C 133.35,55.84 SPEAKER.1
PISO-CONNECT
  Top 0.406: PISO2.3 62.23,27.94 64.14,29.84 66,30.59 68.58,31.11 88.27,31.11 89.47,31.3 90.81,31.75 92.39,32.7 93.98,34.29 PISO1.11
PISO_CLK
  Top 0.406: PISO1.10 91.44,34.29 90.17,33.02 88.9,32.38 54.61,32.38 53.66,32.7 52.07,34.29 PISO2.10
  Bottom 0.406: PIC16F690.16 122.56,22.23 113.35,31.43 112.46,31.94 111.7,32.19 110.49,32.38 95.25,32.38 93.99,32.52 91.44,33.8 PISO1.10
PISO_DAT
  Top 0.406: PIC16F690.12 121.92,12.06 121.28,12.7 120.9,13.46 120.65,14.61 120.65,26.04 120.12,29.25 119.38,31.11 118.75,31.75 117.47,32.38 115.57,32.38 103.44,29.5 102.21,28.61 102.04,28.32 PISO1.3
PISO_LAT
  Bottom 0.406: PISO1.9 88.9,32.38 | 88.9,32.38 52.07,32.38 51.12,32.7 49.53,34.29 PISO2.9 | 88.9,32.38 93.98,31.11 109.86,31.11 111.06,30.92 111.82,30.67 112.71,30.16 119.7,23.18 120.65,20.95 121.92,19.68 PIC16F690.15
PWM
  Top 0.406: PIC16F690.5 130.18,22.23 128.91,23.5 128.91,34.92 131.87,42.63 133.03,44.13 R10.2
SIPO_CLK
  Top 0.406: IC1.3 48.26,70.48 50.16,68.58 54.61,68.58 55.24,69.22 55.24,72.39 55.88,73.03 69.22,73.03 69.85,72.39 IC2.3 69.85,68.58 71.12,67.31 74.93,67.31 76.2,68.58 76.2,71.75 77.47,73.03 97.16,73.03 97.79,72.39 IC3.3 98.06,69.25 98.6,68.12 99.19,67.56 99.69,67.31 102.87,67.31 104.78,69.22 104.78,72.39 105.41,73.03 118.11,73.03 119.38,71.75 IC4.3 119.38,68.58 120.65,67.31 123.19,67.31 123.83,66.67 123.83,46.99 126.36,41.91 126.36,40.01 125.09,36.83 125.09,15.24 128.27,12.06 PIC16F690.9
  Bottom 0.406: 119.38,71.75 IC4.3
SIPO_DAT
  Top 0.406: IC1.2 50.8,73.03 49.53,74.3 36.2,74.3 33.66,76.83 33.66,80.01 34.92,81.28 54.61,81.28 55.88,82.55 78.74,82.55 82.55,83.82 89.53,83.82 93.34,82.55 121.28,82.55 123.19,80.64 123.19,77.47 126.36,74.3 126.36,48.26 128.91,43.18 128.91,38.73 127.64,35.56 127.64,16.51 129.54,14.61 PIC16F690.8
SIPO_LAT
  Top 0.406: IC2.1 74.93,71.75 | IC1.1 53.34,73.03 54.61,74.3 69.85,74.3 71.12,73.03 71.12,69.22 71.75,68.58 74.3,68.58 74.93,69.22 IC2.1 | IC2.1 74.93,73.03 76.2,74.3 97.79,74.3 99.06,73.03 99.06,69.85 99.25,69.28 99.82,68.83 100.33,68.58 102.23,68.58 102.87,69.22 IC3.1 102.87,73.03 104.14,74.3 118.75,74.3 120.65,72.39 120.65,69.22 121.28,68.58 124.46,68.58 | 130.18,19.68 PIC16F690.6 131.44,19.68 133.35,17.78 133.35,13.97 132.72,13.34 128.91,13.34 126.36,15.88 126.36,36.2 127.64,39.37 127.64,42.55 125.09,47.62 125.09,67.94 124.46,68.58 | 124.46,68.58 IC4.1
SIPO_OE
  Top 0.406: 72.39,81.28 56.52,81.28 55.24,80.01 55.24,77.47 54.61,76.83 51.44,76.83 50.8,77.47 IC1.15 | 72.39,81.28 IC2.15 | 100.33,81.28 IC3.15 | 100.33,81.28 120.02,81.28 121.92,79.38 IC4.15 121.92,78.11 | 72.39,81.28 78.74,81.28 82.55,82.55 88.9,82.55 93.34,81.28 100.33,81.28
  Bottom 0.406: IC1.15 50.8,79.38 48.9,81.28 34.92,81.28 33.66,80.01 29.9,66.02 27.39,49.52 27.3,48.9 27.3,47.62 27.94,46.35 31.11,43.18 47.51,32.09 48.85,31.55 49.59,31.39 51.28,31.11 87.63,31.11 93.34,29.84 106.68,29.84 107.77,29.56 108.06,29.38 108.77,28.7 114.31,20.96 114.89,20.28 115.63,19.77 121.3,18.52 121.92,18.41 125.09,18.41 125.73,19.05 125.73,24.13 125.09,24.77 PIC16F690.17 123.83,24.77
VDD  (3 unrouted)
  Top 0.406: R20.1 135.25,5.13
  Top 0.813: C10.1 97.08,10.87 S12.1 93.7,12.42 93.34,12.06 | C9.1 76.76,10.87 S11.1 73.3,12.42 73.03,12.7 | C8.1 56.44,10.87 S2.1 56.16,12.7 52.7,12.7 | 135.25,5.13 137.16,5.13 | 29.17,28.57 29.84,28.57 | 139.7,43.14 POWER.1 135.85,43.14 134.3,41.59 133.53,40.51 132.35,38.03 PIC16F690.1 | 29.17,40.6 R12.1 | 29.17,38.1 C12.1 | C11.1 146.98,32.68 | R15.1 130.81,52.7 130.81,56.52 | R79.1 130.81,56.52 | 130.81,56.52 130.81,59.69 | 43.81,5.13 R77.2 | S3.1 52.7,17.17 | 52.7,17.17 C4.1 | C5.1 72.39,17.17 73.03,17.17 | 73.03,17.17 S4.1 | C6.1 93.34,17.17 | 93.34,17.17 S5.1 | C7.1 113.67,17.17 | 113.67,17.17 S6.1 | 113.67,17.17 | 113.67,17.17 113.67,5.13 | 93.34,17.17 | 93.34,17.17 93.34,12.06 | 93.34,12.06 93.34,5.13 | 73.03,5.13 73.03,12.7 | 73.03,12.7 73.03,17.17 | 73.03,17.17 | 52.7,5.13 | 52.7,5.13 52.7,12.7 | 52.7,12.7 52.7,17.17 | R92.1 118.75,5.13
  Top 1.27: R12.1 29.18,21.58 29.79,17.27 30.69,14.68 32.09,12.41 36.86,7.65 39.31,6.25 43.81,5.13 52.7,5.13 73.03,5.13 93.34,5.13 113.67,5.13 118.75,5.13 137.16,5.13 140.24,5.92 144.15,7.62 149.22,12.7 150.62,15.49 151.13,18.41 151.13,23.5 150.61,26.51 149.57,29.95 148.36,32.2 147.56,33.21 | 116.84,87 119.06,87 123.06,85.4 124.78,84.14 126.36,82.55 131.55,76.24 132.08,74.93 133.35,71.75 133.35,69.22 130.81,59.69 130.81,52.7 132.08,51.44 137.16,51.44 138.96,50.12 139.7,48.26 139.7,45.09 139.7,43.18 | 116.84,87 102.87,87 | 102.87,87 74.93,87 | 74.93,87 62.23,87 58.36,86.55 57.21,86.17 54.61,84.45 C3.1 | C14.1 74.93,87 | C15.1 102.87,87 | C16.1 116.84,87 | 147.56,33.21 139.7,43.14 139.7,43.18 | 139.7,43.18 POWER.1 | C11.1 147.56,33.21 | 29.84,28.57 SNOOZE.1 | U1.VDD 29.17,24.13
  Bottom 0.813: PISO2.16 73.03,34.92 | C18.1 73.03,34.92 | IC2.16 C14.1 79.17,79.3 79.38,78.74 79.38,69.85 78.69,68.61 77.03,67.02 LD2.16 | C15.1 IC3.16 102.87,75.56 104.78,73.66 104.78,67.94 LD3.16 | C3.1 IC1.16 53.34,75.56 55.24,73.66 55.24,66.67 LD1.16 | 130.81,33.66 130.81,33.02 | 73.03,34.92 79.38,34.92 | 79.38,34.92 82.55,34.92 83.19,34.92 R14.1 | R13.1 79.38,34.92 | C17.1 C19.2 128.91,35.56 | LD4.16 122.56,64.77 124.14,63.18 127,57.78 R79.1 | SW1.D 142.24,28.57 143.01,28.88 143.55,28.98 144.17,29.09 144.97,29.78 C11.1 | C16.1 117.92,82.84 119.45,82.25 122.61,81.55 123.74,80.59 124.16,79.94 IC4.16
  Bottom 1.27: PISO2.16 82.55,34.92 88.9,38.1 104.14,38.1 106.73,36.95 | 106.68,35.56 PISO1.16 106.73,36.95 | 130.81,33.66 128.91,35.56 C17.1 106.73,36.95 | 130.81,33.02 PIC16F690.1
VSS
  Top 0.406: PIC16F690.20 PIC16F690.19 PIC16F690.18 | PISO2.13 59.69,38.1 | PISO2.14 62.23,38.1 | PISO2.15 64.77,38.1
  Top 0.813: 88.9,27.94 PISO1.8 89.63,29.06 90.81,29.84 97.09,31.94 97.77,32.42 98.72,33.58 PISO1.13 | R9.1 C17.2 | 118.11,38.1 R9.1 | R9.1 117.47,38.1 | C19.1 119.38,38.1 R9.1 | C3.2 34.29,83.19 31.75,80.64 31.75,74.93 IC1.8
  Top 1.27: R1.2 45.72,27.3 44.45,28.57 44.45,31.11 R11.1 47.2,37.68 48.9,38.1 53.34,38.1 | 101.6,38.1 C17.2 C19.1 IC10.8 | 101.6,38.1 99.06,38.1 | 99.06,38.1 C18.2 | IC8.8 C18.2 | PIC16F690.20 120.65,33.02 119.38,34.29 119.38,38.1 | PISO1.13 99.06,38.1 | 101.6,38.1 101.33,38.73 99.06,44.2 IC9.8 | C18.2 64.77,38.1 62.23,38.1 59.69,38.1 53.34,38.1 | IC7.8 53.34,38.1
  Bottom 0.406: PISO1.13 PISO1.14 PISO1.15
  Bottom 0.813: 46.99,5.08 R6.1 R2.1 | 67.31,5.08 R7.1 R3.1 | 87.63,5.08 R8.1 R4.1 | 46.99,5.08 44.45,5.08 | 46.99,5.08 67.31,5.08 | 67.31,5.08 87.63,5.08 | R1.2 PISO2.8 | R5.1 107.95,5.08 | 87.63,5.08 107.95,5.08 | 107.95,5.08 136.53,5.08 | 148.59,12.06 149.54,13.02 | IC2.8 57.15,74.93 55.24,76.83 55.24,81.28 57.78,87 77.47,87 | IC4.8 106.68,74.3 104.78,77.47 104.78,80.01 105.41,82.55 C15.2 105.41,87 | 77.47,87 86.36,87 | 86.36,87 105.41,87 | 77.47,87 C14.2 | 105.41,87 119.38,87 119.38,86.36 | 57.15,87 55.24,87 | POWER.2 136.49,38.14 | 119.38,86.36 120.65,86.36 | C1.1 139.06,31.75 C2.1 POWER.2 | T2.1 80.01,55.88 | 80.01,55.88 T3.1 | 80.01,55.88 81.28,55.88 82.55,57.15 82.55,66.04 IC3.8 83.19,76.83 83.19,81.28 86.36,87 | 109.88,38.12 C17.2 | POWER.2 136.5,38.12 | T1.1 31.75,64.77 31.98,65.94 32.54,67.24 33.66,68.58 35.56,70.48 IC1.8 | POWER.2 136.56,38.18 | 151.13,24.84 151.15,24.86 151.13,22.94 S10.3 | C16.2 119.38,86.36 | SW1.C 141.6,10.79 144.46,7.94 | 132.72,73.03 129.54,73.03 | T4.1 129.54,73.03 | 129.54,73.03 132.98,73.12
  Bottom 1.27: T5.E 138.43,59.05 | C19.1 POWER.2 142.24,38.16 | U1.GND 33.02,13.34 33.66,10.79 36.51,7.94 39.59,6.09 44.45,5.08 136.53,5.08 139.73,5.66 144.15,7.62 144.46,7.94 148.59,12.06 149.9,13.95 150.41,15.27 151.13,18.41 151.13,22.94 151.13,23.5 | 144.46,37.87 140.52,43.31 139.7,46.35 139.7,47.62 T5.E | 144.46,37.87 147.96,33.02 149.56,29.96 149.82,29.2 | 142.24,38.16 144.24,38.17 144.46,37.87 | C13.2 142.24,38.16 | 149.82,29.2 150.29,27.87 151.13,23.5 | 151.13,23.5 149.82,29.2 | C3.2 50.8,84.45 52.07,85.72 53.85,86.61 57.15,87 57.78,87 86.36,87 119.06,87 120.65,86.36 122.51,85.62 125.05,83.78 130.47,77.89 132.08,75.56 132.98,73.12 133.47,71.8 | T5.E 137.24,61.63 133.47,71.8 | T5.E 133.47,71.8